# Altium PCB PCB Down.PcbDoc
Units mm, origin at the board's own origin, x right, y up, seen from the top; angles counter-clockwise.
Board outline 90 x 60 mm, 2 copper layers (Top Layer, Bottom Layer), stack 1.569 mm thick; 40 components, 39 nets, 160 pads, 35 vias.
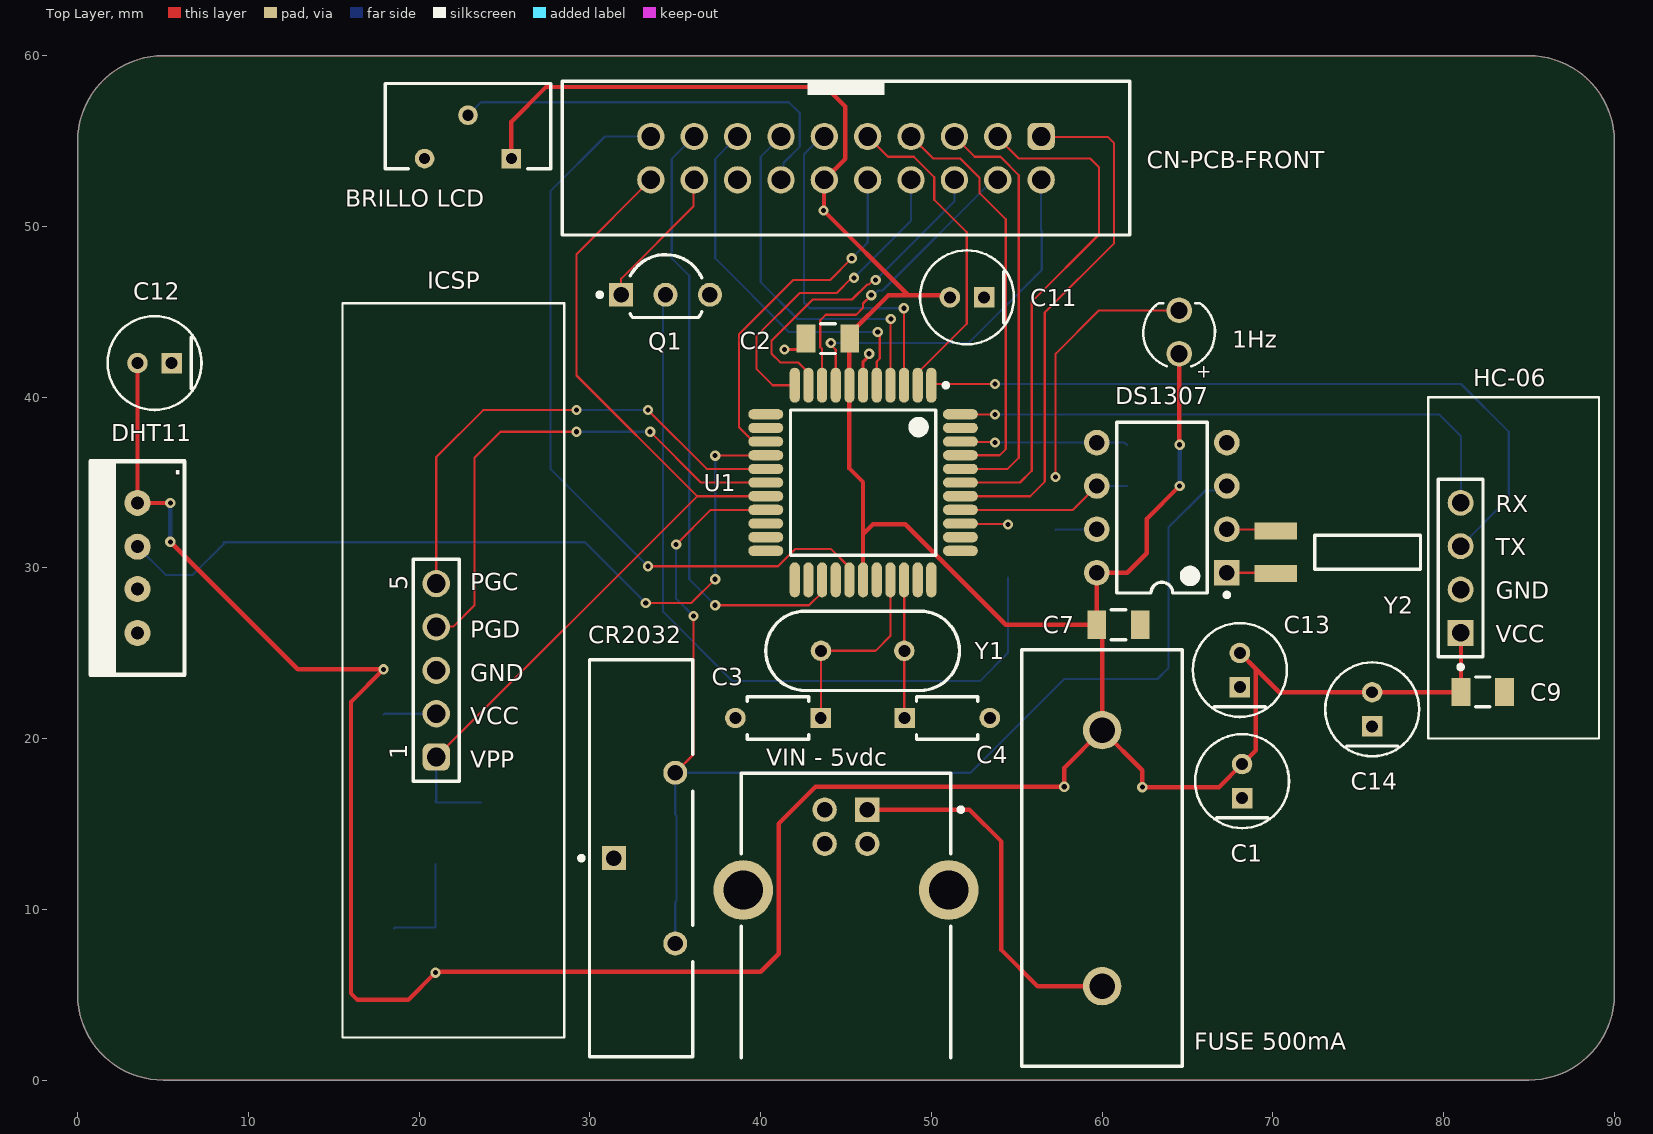
[diagram p0: Top Layer view]
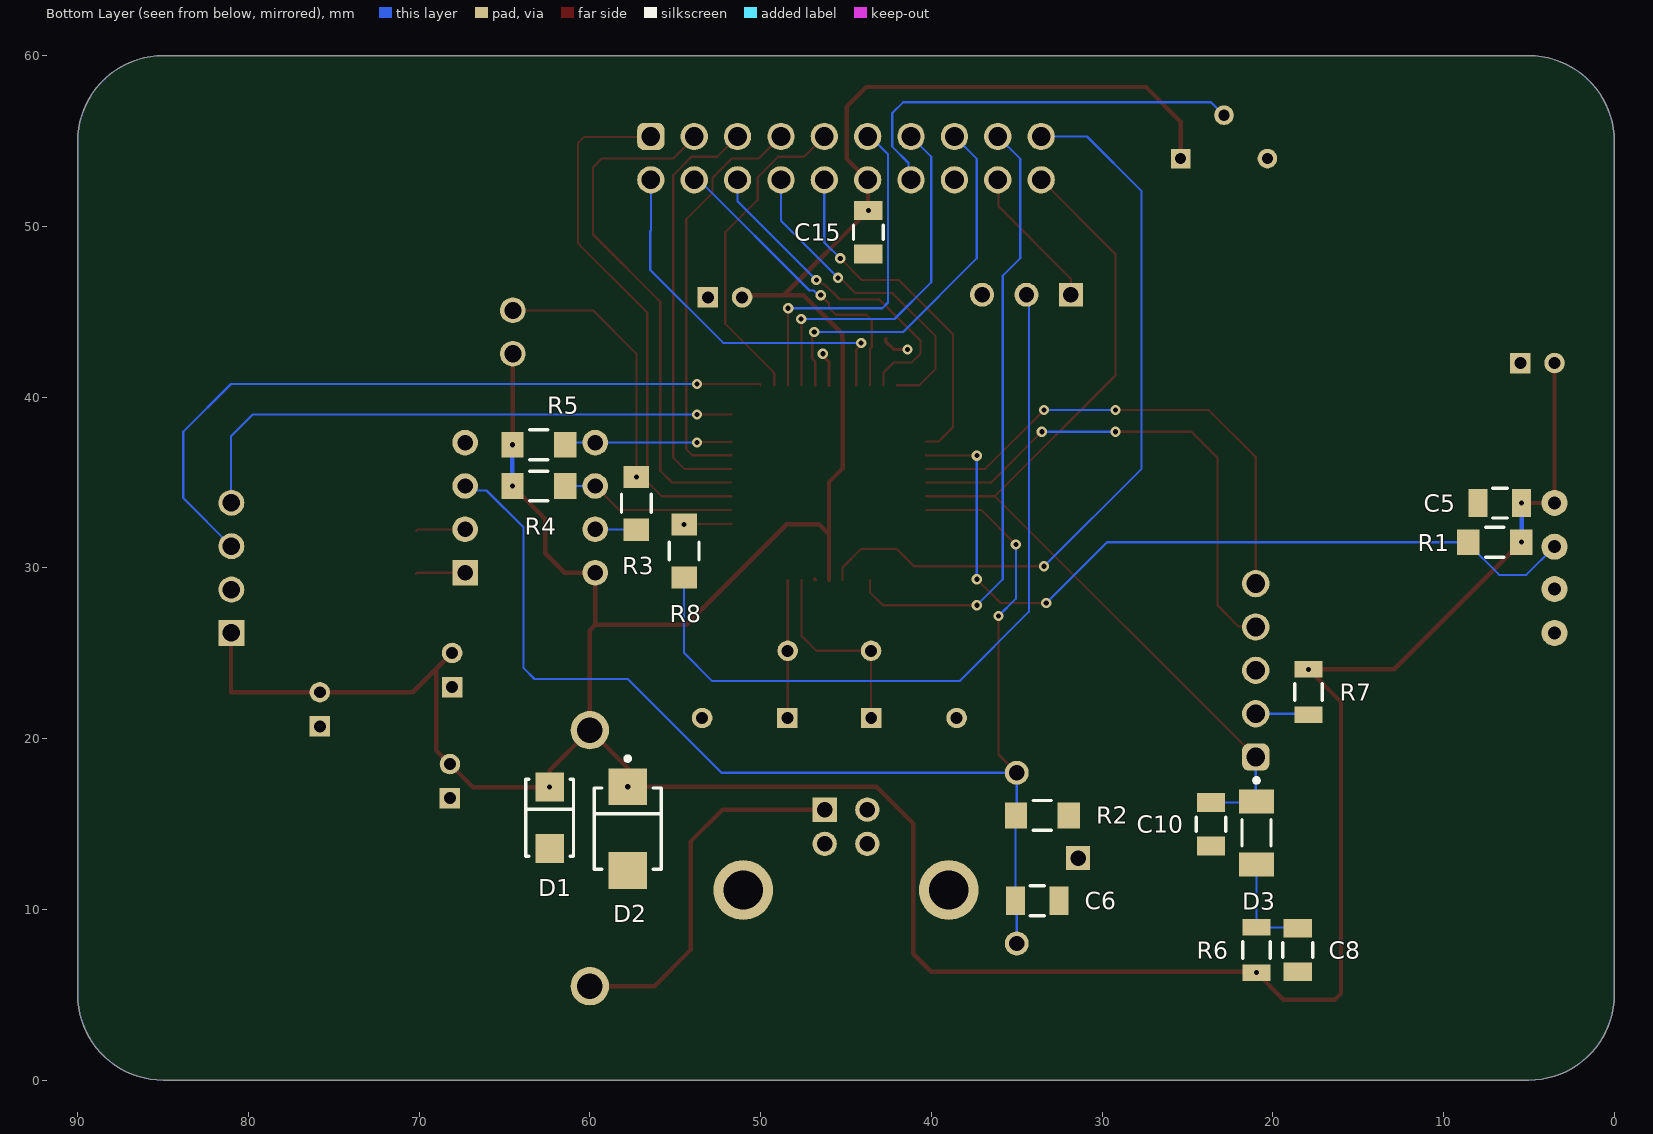
[diagram p1: Bottom Layer view, seen from below]

## Layer stack, top to bottom
Top Solder: solder mask 0.0254, SM-001, Dk 4
Top Layer: signal copper 0.035
Dielectric 1: core 1.4986, Core-043, Dk 4.3
Bottom Layer: signal copper 0.035
Bottom Solder: solder mask 0.0254, SM-001, Dk 4

## Board outline
0,5 0,55 cw(c5,55) 5,60 85,60 cw(c85,55) 90,55 90,5 cw(c85,5) 85,0 5,0 cw(c5,5)

## Design rules (kind name [scope] priority, off if disabled: settings)
AssemblyTestPointUsage [All] p0: scope1count=1 scope1_0_kind=Board scope1_0_value=Board scope2count=1 scope2_0_kind=Board scope2_0_value=Board commentlength=0
AssemblyTestpoint [All] p0: scope1count=1 scope1_0_kind=Board scope1_0_value=Board scope2count=1 scope2_0_kind=Board scope2_0_value=Board commentlength=0
BoardOutlineClearance "JLCPCB BoardOutlineClearance" [All] p0: scope1count=1 scope1_0_kind=Board scope1_0_value=Board scope2count=1 scope2_0_kind=Board scope2_0_value=Board commentlength=0 gap=0.3
BoardOutlineClearance "JLCPCB BoardOutlineClearance" [All] p1: gap=0.3 ignorepadtopadclearanceinfootprint=FALSE
Clearance [All] p0: scope1count=1 scope1_0_kind=Board scope1_0_value=Board scope2count=1 scope2_0_kind=Board scope2_0_value=Board commentlength=0 gap=0.254
Clearance "JLCPCB 1 Clearance" [All] p0: scope1count=1 scope1_0_kind=Board scope1_0_value=Board scope2count=1 scope2_0_kind=Board scope2_0_value=Board commentlength=0 gap=0.254
Clearance "JLCPCB 1 Clearance" [All] p1: gap=0.254 ignorepadtopadclearanceinfootprint=FALSE except(0.127: Arc-Arc Arc-Track Track-Track SMDPad-SMDPad; 0.2: Arc-SMDPad Arc-THPad Track-SMDPad Track-THPad; 0.5: THPad-THPad)
Clearance [All] p2: gap=0.254 ignorepadtopadclearanceinfootprint=FALSE except(0: Arc-Hole Track-Hole SMDPad-Hole THPad-Hole Via-Hole Fill-Hole Poly-Hole Region-Hole Text-Hole)
ComponentClearance [All] p0: scope1count=1 scope1_0_kind=Board scope1_0_value=Board scope2count=1 scope2_0_kind=Board scope2_0_value=Board commentlength=0 gap=0.254 collisioncheckmode=3
DiffPairsRouting "JLCPCB DiffPairsRouting_3" [All] p0 off: scope1count=1 scope1_0_kind=Board scope1_0_value=Board scope2count=1 scope2_0_kind=Board scope2_0_value=Board commentlength=9 // 2 oZ PCB
DiffPairsRouting "JLCPCB DiffPairsRouting_2" [All] p0 off: scope1count=1 scope1_0_kind=Board scope1_0_value=Board scope2count=1 scope2_0_kind=Board scope2_0_value=Board commentlength=15 // 4 and 6 layers
DiffPairsRouting "JLCPCB DiffPairsRouting_1" [All] p0: scope1count=1 scope1_0_kind=Board scope1_0_value=Board scope2count=1 scope2_0_kind=Board scope2_0_value=Board commentlength=15 // 1 and 2 layers
DiffPairsRouting [All] p0: scope1count=1 scope1_0_kind=Board scope1_0_value=Board scope2count=1 scope2_0_kind=Board scope2_0_value=Board commentlength=0
DiffPairsRouting "JLCPCB DiffPairsRouting_1" [All] p1: maxlimit=0.254 minlimit=0.127 mostfreqgap=0.127 toplayer_minwidth=0.127 toplayer_maxwidth=0.381 toplayer_prefwidth=0.127 bottomlayer_minwidth=0.127 bottomlayer_maxwidth=0.381 bottomlayer_prefwidth=0.127 maxuncoupledlength=12.7 // 1 and 2 layers
DiffPairsRouting "JLCPCB DiffPairsRouting_2" [All] p2 off: maxlimit=0.254 minlimit=0.09 mostfreqgap=0.254 toplayer_minwidth=0.09 toplayer_maxwidth=0.381 toplayer_prefwidth=0.381 bottomlayer_minwidth=0.09 bottomlayer_maxwidth=0.381 bottomlayer_prefwidth=0.381 maxuncoupledlength=12.7 // 4 and 6 layers
DiffPairsRouting "JLCPCB DiffPairsRouting_3" [All] p3 off: maxlimit=0.254 minlimit=0.02 mostfreqgap=0.254 toplayer_minwidth=0.02 toplayer_maxwidth=0.381 toplayer_prefwidth=0.381 bottomlayer_minwidth=0.02 bottomlayer_maxwidth=0.381 bottomlayer_prefwidth=0.381 maxuncoupledlength=12.7 // 2 oZ PCB
DiffPairsRouting [All] p4: maxlimit=0.254 minlimit=0.254 mostfreqgap=0.254 toplayer_minwidth=0.381 toplayer_maxwidth=0.381 toplayer_prefwidth=0.381 bottomlayer_minwidth=0.381 bottomlayer_maxwidth=0.381 bottomlayer_prefwidth=0.381 maxuncoupledlength=12.7
FabricationTestPointUsage [All] p0: scope1count=1 scope1_0_kind=Board scope1_0_value=Board scope2count=1 scope2_0_kind=Board scope2_0_value=Board commentlength=0 valid=0 allowmultiple=FALSE
FabricationTestpoint [All] p0: scope1count=1 scope1_0_kind=Board scope1_0_value=Board scope2count=1 scope2_0_kind=Board scope2_0_value=Board commentlength=0 side=3 testpointundercomponent=TRUE minsize=1.016 maxsize=2.54 preferedsize=1.524 minholesize=0 maxholesize=1.016 preferedholesize=0.813 testpointgrid=0.025
FanoutControl Fanout_BGA [All] p0 off: scope1count=1 scope1_0_kind=Board scope1_0_value=Board scope2count=1 scope2_0_kind=Board scope2_0_value=Board commentlength=69 // Protel DXP Scope 1 Expression Was: IsBGA   Fanout_BGA (Default Rule)
FanoutControl Fanout_LCC [All] p0 off: scope1count=1 scope1_0_kind=Board scope1_0_value=Board scope2count=1 scope2_0_kind=Board scope2_0_value=Board commentlength=69 // Protel DXP Scope 1 Expression Was: IsLCC   Fanout_LCC (Default Rule)
FanoutControl Fanout_SOIC [All] p0 off: scope1count=1 scope1_0_kind=Board scope1_0_value=Board scope2count=1 scope2_0_kind=Board scope2_0_value=Board commentlength=71 // Protel DXP Scope 1 Expression Was: IsSOIC   Fanout_SOIC (Default Rule)
FanoutControl Fanout_Small [All] p0 off: scope1count=1 scope1_0_kind=Board scope1_0_value=Board scope2count=1 scope2_0_kind=Board scope2_0_value=Board commentlength=84 // Protel DXP Scope 1 Expression Was: (CompPinCount < 5)   Fanout_Small (Default Rule)
FanoutControl Fanout_Default [All] p0: scope1count=1 scope1_0_kind=Board scope1_0_value=Board scope2count=1 scope2_0_kind=Board scope2_0_value=Board commentlength=30 // Fanout_Default (Default Rule)
Height [All] p0: scope1count=1 scope1_0_kind=Board scope1_0_value=Board scope2count=1 scope2_0_kind=Board scope2_0_value=Board commentlength=0
HoleSize "JLCPCB 2 Hole Size" [All] p0 off: scope1count=1 scope1_0_kind=Board scope1_0_value=Board scope2count=1 scope2_0_kind=Board scope2_0_value=Board commentlength=12 absolutevalues=TRUE maxlimit=6.3 minlimit=0.15 maxpercent=80.000 minpercent=20.000 // MULTILAYERS
HoleSize HoleSize_1 [All] p0: scope1count=1 scope1_0_kind=Board scope1_0_value=Board scope2count=1 scope2_0_kind=Board scope2_0_value=Board commentlength=0 absolutevalues=TRUE maxlimit=2.54 minlimit=0.03 maxpercent=80.000 minpercent=20.000
HoleSize "JLCPCB 1 Hole size" [All] p0: scope1count=1 scope1_0_kind=Board scope1_0_value=Board scope2count=1 scope2_0_kind=Board scope2_0_value=Board commentlength=15 absolutevalues=TRUE maxlimit=6.3 minlimit=0.2 maxpercent=80.000 minpercent=20.000 // 1 and 2 Layers
HoleSize "JLCPCB 1 Hole size" [All] p1: absolutevalues=TRUE maxlimit=6.3 minlimit=0.2 maxpercent=80.000 minpercent=20.000 // 1 and 2 Layers
HoleSize "JLCPCB 2 Hole Size" [All] p2 off: absolutevalues=TRUE maxlimit=6.3 minlimit=0.15 maxpercent=80.000 minpercent=20.000 // MULTILAYERS
HoleSize HoleSize_1 [All] p3: absolutevalues=TRUE maxlimit=2.54 minlimit=0.03 maxpercent=80.000 minpercent=20.000
HoleToHoleClearance [All] p0: scope1count=1 scope1_0_kind=Board scope1_0_value=Board scope2count=1 scope2_0_kind=Board scope2_0_value=Board commentlength=0
HoleToHoleClearance "JLCPCB HoleToHoleClearance" [All] p0: scope1count=1 scope1_0_kind=Board scope1_0_value=Board scope2count=1 scope2_0_kind=Board scope2_0_value=Board commentlength=0
HoleToHoleClearance "JLCPCB HoleToHoleClearance" [All] p1: gap=0.5 allowstackedmicrovias=TRUE
HoleToHoleClearance [All] p2: gap=0.254 allowstackedmicrovias=TRUE
LayerPairs [All] p0: scope1count=1 scope1_0_kind=Board scope1_0_value=Board scope2count=1 scope2_0_kind=Board scope2_0_value=Board commentlength=0 enforce=TRUE
MinimumAnnularRing "JLCPCB Annular ring" [All] p0: scope1count=1 scope1_0_kind=Board scope1_0_value=Board scope2count=1 scope2_0_kind=Board scope2_0_value=Board commentlength=5 minimumring=0.13 // 1 oZ
MinimumAnnularRing "JLCPCB Annular ring" [All] p1: minimumring=0.13 // 1 oZ
MinimumSolderMaskSliver "JLCPCB MinimumSolderMaskSliver_1" [All] p0: scope1count=1 scope1_0_kind=Board scope1_0_value=Board scope2count=1 scope2_0_kind=Board scope2_0_value=Board commentlength=0
MinimumSolderMaskSliver [All] p0: scope1count=1 scope1_0_kind=Board scope1_0_value=Board scope2count=1 scope2_0_kind=Board scope2_0_value=Board commentlength=0
MinimumSolderMaskSliver "JLCPCB MinimumSolderMaskSliver_1" [All] p1: minsoldermaskwidth=0.1
MinimumSolderMaskSliver [All] p2: minsoldermaskwidth=0.254
NetAntennae "JLCPCB NetAntennae_1" [All] p0 off: scope1count=1 scope1_0_kind=Board scope1_0_value=Board scope2count=1 scope2_0_kind=Board scope2_0_value=Board commentlength=0
NetAntennae [All] p0 off: scope1count=1 scope1_0_kind=Board scope1_0_value=Board scope2count=1 scope2_0_kind=Board scope2_0_value=Board commentlength=0
NetAntennae "JLCPCB NetAntennae_1" [All] p1 off: netantennaetolerance=0
NetAntennae [All] p2 off: netantennaetolerance=0
PasteMaskExpansion [All] p0: scope1count=1 scope1_0_kind=Board scope1_0_value=Board scope2count=1 scope2_0_kind=Board scope2_0_value=Board commentlength=0 expansion=0
PlaneClearance [All] p0: scope1count=1 scope1_0_kind=Board scope1_0_value=Board scope2count=1 scope2_0_kind=Board scope2_0_value=Board commentlength=0 clearance=0.508
PlaneConnect [All] p0: scope1count=1 scope1_0_kind=Board scope1_0_value=Board scope2count=1 scope2_0_kind=Board scope2_0_value=Board commentlength=0 planeconnectstyle=Relief reliefexpansion=0.508 reliefentries=4 reliefconductorwidth=0.254 reliefairgap=0.254
PolygonConnect [All] p0: scope1count=1 scope1_0_kind=Board scope1_0_value=Board scope2count=1 scope2_0_kind=Board scope2_0_value=Board commentlength=0 connectstyle=Relief reliefconductorwidth=0.254 reliefentries=4 polygonreliefangle="90 Angle"
PolygonConnect [All] p1: connectstyle=Relief reliefconductorwidth=0.254 reliefentries=4 polygonreliefangle="90 Angle" airgapwidth=0.254
RoutingCorners [All] p0: scope1count=1 scope1_0_kind=Board scope1_0_value=Board scope2count=1 scope2_0_kind=Board scope2_0_value=Board commentlength=0 cornerstyle=45-Degree minsetback=2.54 maxsetback=2.54
RoutingLayers [All] p0: scope1count=1 scope1_0_kind=Board scope1_0_value=Board scope2count=1 scope2_0_kind=Board scope2_0_value=Board commentlength=0 top layer=Automatic bottom layer=Automatic
RoutingPriority [All] p0: scope1count=1 scope1_0_kind=Board scope1_0_value=Board scope2count=1 scope2_0_kind=Board scope2_0_value=Board commentlength=0
RoutingTopology [All] p0: scope1count=1 scope1_0_kind=Board scope1_0_value=Board scope2count=1 scope2_0_kind=Board scope2_0_value=Board commentlength=0 topology=Shortest
RoutingVias RoutingVias_1 [All] p0: scope1count=1 scope1_0_kind=Board scope1_0_value=Board scope2count=1 scope2_0_kind=Board scope2_0_value=Board commentlength=0 holewidth=0.711 width=1.27 viastyle="Through Hole" minholewidth=0.711 minwidth=1.27 maxholewidth=0.711 maxwidth=1.27
RoutingVias "JLCPCB 1RoutingVias" [All] p0: scope1count=1 scope1_0_kind=Board scope1_0_value=Board scope2count=1 scope2_0_kind=Board scope2_0_value=Board commentlength=15 holewidth=0.711 width=1.27 viastyle="Through Hole" minholewidth=0.3 minwidth=0.5 maxholewidth=0.711 maxwidth=1.27 // 1 and 2 layers
RoutingVias "JLCPCB 2 RoutingVias" [All] p0: scope1count=1 scope1_0_kind=Board scope1_0_value=Board scope2count=1 scope2_0_kind=Board scope2_0_value=Board commentlength=12 holewidth=0.711 width=1.27 viastyle="Through Hole" minholewidth=0.15 minwidth=0.25 maxholewidth=0.711 maxwidth=1.27 // Multilayers
RoutingVias "JLCPCB 1RoutingVias" [All] p1: holewidth=0.711 width=1.27 viastyle="Through Hole" minholewidth=0.3 minwidth=0.5 maxholewidth=0.711 maxwidth=1.27 // 1 and 2 layers
RoutingVias "JLCPCB 2 RoutingVias" [All] p2: holewidth=0.711 width=1.27 viastyle="Through Hole" minholewidth=0.15 minwidth=0.25 maxholewidth=0.711 maxwidth=1.27 // Multilayers
RoutingVias RoutingVias_1 [All] p3: holewidth=0.711 width=1.27 viastyle="Through Hole" minholewidth=0.711 minwidth=1.27 maxholewidth=0.711 maxwidth=1.27
ShortCircuit [All] p0: scope1count=1 scope1_0_kind=Board scope1_0_value=Board scope2count=1 scope2_0_kind=Board scope2_0_value=Board commentlength=0 allowed=FALSE
SilkToBoardRegionClearance [All] p0: scope1count=1 scope1_0_kind=Board scope1_0_value=Board scope2count=1 scope2_0_kind=Board scope2_0_value=Board commentlength=0
SilkToSilkClearance "JLCPCB SilkToSilkClearance_1" [All] p0: scope1count=1 scope1_0_kind=Board scope1_0_value=Board scope2count=1 scope2_0_kind=Board scope2_0_value=Board commentlength=0
SilkToSilkClearance [All] p0: scope1count=1 scope1_0_kind=Board scope1_0_value=Board scope2count=1 scope2_0_kind=Board scope2_0_value=Board commentlength=0
SilkToSilkClearance "JLCPCB SilkToSilkClearance_1" [All] p1: silktosilkclearance=0.15
SilkToSilkClearance [All] p2: silktosilkclearance=0.254
SilkToSolderMaskClearance "JLCPCB SilkToSolderMaskClearance_1 Ilegal" [All] p0 off: scope1count=1 scope1_0_kind=Board scope1_0_value=Board scope2count=1 scope2_0_kind=Board scope2_0_value=Board commentlength=44 // Protel DXP Scope 1 Expression Was: IsPad
SilkToSolderMaskClearance "JLCPCB SilkToSolderMaskClearance_1" [All] p0 off: scope1count=1 scope1_0_kind=Board scope1_0_value=Board scope2count=1 scope2_0_kind=Board scope2_0_value=Board commentlength=44 // Protel DXP Scope 1 Expression Was: IsPad
SilkToSolderMaskClearance [All] p0 off: scope1count=1 scope1_0_kind=Board scope1_0_value=Board scope2count=1 scope2_0_kind=Board scope2_0_value=Board commentlength=44 // Protel DXP Scope 1 Expression Was: IsPad
SilkToSolderMaskClearance "JLCPCB SilkToSolderMaskClearance_1 Ilegal" [IsPad] p1: minsilkscreentomaskgap=0.1 clearancetoexposedcopper=TRUE
SilkToSolderMaskClearance "JLCPCB SilkToSolderMaskClearance_1" [IsPad] p2: minsilkscreentomaskgap=0.15 clearancetoexposedcopper=TRUE
SilkToSolderMaskClearance [IsPad] p3: minsilkscreentomaskgap=0.254 clearancetoexposedcopper=TRUE
SolderMaskExpansion "JLCPCB SolderMaskExpansion_1" [All] p0: scope1count=1 scope1_0_kind=Board scope1_0_value=Board scope2count=1 scope2_0_kind=Board scope2_0_value=Board commentlength=0 expansion=0.038
SolderMaskExpansion [All] p0: scope1count=1 scope1_0_kind=Board scope1_0_value=Board scope2count=1 scope2_0_kind=Board scope2_0_value=Board commentlength=0 expansion=0.102
SolderMaskExpansion "JLCPCB SolderMaskExpansion_1" [All] p1: expansion=0.038 istentingtop=FALSE useseparateexpansions=TRUE expansionbottom=0.05 istentingbottom=FALSE
SolderMaskExpansion [All] p2: expansion=0.102 istentingtop=FALSE
UnRoutedNet [All] p0: scope1count=1 scope1_0_kind=Board scope1_0_value=Board scope2count=1 scope2_0_kind=Board scope2_0_value=Board commentlength=0
UnpouredPolygon [All] p0: scope1count=1 scope1_0_kind=Board scope1_0_value=Board scope2count=1 scope2_0_kind=Board scope2_0_value=Board commentlength=0
Width "JLCPCB Width 3" [All] p0 off: scope1count=1 scope1_0_kind=Board scope1_0_value=Board scope2count=1 scope2_0_kind=Board scope2_0_value=Board commentlength=9 maxlimit=0.254 minlimit=0.02 preferedwidth=0.254 // 2 oZ PCB
Width "JLCPCB Width 2" [All] p0 off: scope1count=1 scope1_0_kind=Board scope1_0_value=Board scope2count=1 scope2_0_kind=Board scope2_0_value=Board commentlength=15 maxlimit=0.254 minlimit=0.09 preferedwidth=0.254 // 4 and 6 Layers
Width [All] p0: scope1count=1 scope1_0_kind=Board scope1_0_value=Board scope2count=1 scope2_0_kind=Board scope2_0_value=Board commentlength=0 maxlimit=0.254 minlimit=0.254 preferedwidth=0.254
Width "JLCPCB Width 1" [All] p0: scope1count=1 scope1_0_kind=Board scope1_0_value=Board scope2count=1 scope2_0_kind=Board scope2_0_value=Board commentlength=15 maxlimit=6 minlimit=0.127 preferedwidth=0.127 // 1 and 2 layers
Width "JLCPCB Width 1" [All] p1: maxlimit=6 minlimit=0.127 preferedwidth=0.127 // 1 and 2 layers
Width "JLCPCB Width 2" [All] p2 off: maxlimit=0.254 minlimit=0.09 preferedwidth=0.254 // 4 and 6 Layers
Width "JLCPCB Width 3" [All] p3 off: maxlimit=0.254 minlimit=0.02 preferedwidth=0.254 // 2 oZ PCB
Width [All] p4: maxlimit=0.254 minlimit=0.254 preferedwidth=0.254
23 further rules are at their usual default settings.

## Classes and differential pairs
net class S[0..4]: S0 S1 S2 S3 S4
net class D[0..7]: D0 D1 D2 D3 D4 D5 D6 D7
component class HC-06: C9 C14 HC-06
component class "Sensor de temperatura": C5 C12 DHT11 R1
component class "Salida PCB Front": "BRILLO LCD" C15 CN-PCB-FRONT Q1 R8
component class "Programacion ICSP": C8 C10 D3 ICSP R6 R7
component class Microcontrolador: C2 C3 C4 C11 U1 Y1
component class "Fuente Alimentacion": C1 D1 D2 "FUSE 500mA" "VIN - 5vdc"
component class DS1307: 1Hz C6 C7 C13 CR2032 DS1307 R2 R3 R4 R5 Y2

## Components (designator, comment, footprint, x,y, rotation, side; value= is the part's Value field where it differs from the comment)
1Hz "151031YS05900" WL-TMRC_D3.95H5.3 -1205.484,1313.815 r90 top
"BRILLO LCD" "T93YB103KT20" FP-T93YB-MFG 22.86,55.875 r270 top
C1 "EEUHD1C101" FP-RAD-TH-D_5_0_5-L_11_1-MFG 68.199,17.51 r90 top
C2 "CL31B104KBCNFNC" FP-CL31-IPC_C 43.942,43.434 r0 top
C3 "RCE5C2A150J0K1H03B" FP-RCE0K1-MFG 41.021,21.209 r180 top
C4 "RCE5C2A150J0K1H03B" FP-RCE0K1-MFG 50.927,21.209 r0 top
C5 "CL31B104KBCNFNC" FP-CL31-IPC_C 6.7,33.8 r180 bottom
C6 "CL31B104KBCNFNC" FP-CL31-IPC_C 33.8,10.5 r0 bottom
C7 "CL31B104KBCNFNC" FP-CL31-IPC_C 60.96,26.67 r180 top
C8 "CL31B104KBCNFNC" FP-CL31-IPC_C 18.542,7.62 r90 bottom
C9 "CL31B104KBCNFNC" FP-CL31-IPC_C 82.296,22.733 r180 top
C10 "CL31B104KBCNFNC" FP-CL31-IPC_C 23.622,14.986 r90 bottom
C11 "EEUHD1C101" FP-RAD-TH-D_5_0_5-L_11_1-MFG 52.086,45.847 r180 top
C12 "EEUHD1C101" FP-RAD-TH-D_5_0_5-L_11_1-MFG 4.5,42 r180 top
C13 "EEUHD1C101" FP-RAD-TH-D_5_0_5-L_11_1-MFG 68.072,24.019 r90 top
C14 "EEUHD1C101" FP-RAD-TH-D_5_0_5-L_11_1-MFG 75.819,21.717 r90 top
C15 "CL31B104KBCNFNC" FP-CL31-IPC_C 43.688,49.657 r270 bottom
CN-PCB-FRONT "61202021621" 61202021621 45,54 r180 top
CR2032 "1775485-1" FP-1775485-1-MFG 33,13 r90 top
D1 "ES1D-M3/61T" FP-SMA-MFG 62.357,15.367 r270 bottom
D2 "SMBJ5.0A" FP-SMBJ-MFG 57.785,14.732 r270 bottom
D3 "JAN1N4148UR-1" FP-DO-213AA-MFG 20.955,14.478 r270 bottom
DHT11 "DHT11" DHT11 3.5,30 r0 top
DS1307 "DS1307+" P8+2 63.5,33.528 r180 top
"FUSE 500mA" "696106003002" 696106003002 60,13 r270 top
HC-06 "MTLW-104-05-G-S-185" FP-MTLW-104-05-G-S-185-MFG 81,30 r90 top
ICSP "61300511121" 61300511121 21,24 r90 top
Q1 "BC337-40RL1G" ONSC-TO-92-3-29-11_AM_BL 34.429,46 r0 top
R1 "RC3216F472CS" FP-RC3216-MFG 7,31.5 r180 bottom
R2 "RC3216F472CS" FP-RC3216-MFG 33.5,15.5 r180 bottom
R3 "RC3216F472CS" FP-RC3216-MFG 57.277,33.782 r270 bottom
R4 "RC3216F472CS" FP-RC3216-MFG 62.992,34.798 r180 bottom
R5 "RC3216F472CS" FP-RC3216-MFG 62.992,37.211 r180 bottom
R6 "CRCW120610K0FKEA" FP-CRCW1206-e3-IPC_C 20.955,7.62 r90 bottom
R7 "CRCW120610K0FKEA" FP-CRCW1206-e3-IPC_C 17.907,22.733 r270 bottom
R8 "RC3216F472CS" FP-RC3216-MFG 54.483,30.988 r270 bottom
U1 "PIC16F877A-I/PT" TQFP-PT44_M 46,35 r270 top
"VIN - 5vdc" "67068-8011" FP-67068-8011-MFG 45,9.35 r0 top
Y1 "FOXSLF/120-20" FOX-FOXSLF-2_V 45.974,25.146 r180 top
Y2 "AB26TRB-32.768KHZ-T" FP-AB26TRB-MFG 75.552,30.911 r180 top

## Footprints (in the part's own frame and the unit in brackets; to place one, negate y for a bottom-side part, rotate by r counter-clockwise, add the part's x,y. Pads: shape width x height; smd on the part's side, far side on the other; paste and mask are expansions set on the pad)
61202021621 [mm] "20 pins, straight, gold plating"
  rrect50% 1.6x1.6 hole 1.1: 1(-11.43,-1.27)
  round 1.6 hole 1.1: 2(-11.43,1.27) 3(-8.89,-1.27) 4(-8.89,1.27) 5(-6.35,-1.27) 6(-6.35,1.27) 7(-3.81,-1.27) 8(-3.81,1.27) 9(-1.27,-1.27) 10(-1.27,1.27) 11(1.27,-1.27) 12(1.27,1.27) 13(3.81,-1.27) 14(3.81,1.27) 15(6.35,-1.27) 16(6.35,1.27) 17(8.89,-1.27) 18(8.89,1.27) 19(11.43,-1.27) 20(11.43,1.27)
  silkscreen extent -16.63,-4.5 16.63,4.5
61300511121 [mm] "Pin Header, pitch 2.54 mm, THT, Vertical, single row, 5p"
  rrect50% 1.6x1.6 hole 1.1: 1(-5.08,0)
  round 1.6 hole 1.1: 2(-2.54,0) 3(0,0) 4(2.54,0) 5(5.08,0)
  silkscreen extent -6.5,-1.35 6.5,1.35
696106003002 [mm] "FUSEHOLDER BLOCKS - PCB - CLIP COVER - THT"
  round 2.25 hole 1.5: 1(-7.5,0) 2(7.5,0)
  silkscreen extent -12.2,-4.7 12.2,4.7
DHT11 [mil]
  round 60 hole 30: 1(0,150) 2(0,48.82) 3(0,-48.82) 4(0,-150)
  silkscreen extent -110,-246 108,246
FOX-FOXSLF-2_V [mm] "THD, 2-Leads, Body 11.35x4.65mm, Pitch 4.88mm"
  round 1.2 hole 0.7: 1(-2.44,0) 2(2.44,0)
  silkscreen extent -5.68,-2.32 5.68,2.32
FP-67068-8011-MFG [mm]
  rect 1.42x1.42 hole 0.92 paste-1000 mask+0: 1(1.25,6.49)
  round 1.42 hole 0.92 paste-1000 mask+0: 2(-1.25,6.49) 3(-1.25,4.49) 4(1.25,4.49)
  round 3.5 hole 2.3 paste-1000 mask+0: 5(-6.02,1.78) 6(6.02,1.78)
  silkscreen extent -6.12,-8.05 6.85,8.62
FP-1775485-1-MFG [mm]
  rect 1.4x1.4 hole 0.9 paste-1000 mask+0: 1(0,1.6)
  round 1.4 hole 0.9 paste-1000 mask+0: 2(-5,-2) 2(5,-2)
  silkscreen extent -11.63,-3.03 11.63,3.62
FP-AB26TRB-MFG [mm]
  rect 2.5x1 smd paste+0 mask+0: 1(5.375,1.25) 2(5.375,-1.25)
  silkscreen extent -3.1,-1 3.1,1
FP-CL31-IPC_C [mm]
  rect 1.105x1.658 smd paste+0 mask+0: 1(-1.276,0) 2(1.276,0)
  silkscreen extent -0.42,-0.87 0.42,0.87
FP-CRCW1206-e3-IPC_C [mm]
  rect 0.956x1.658 smd paste+0 mask+0: 1(-1.326,0) 2(1.326,0)
  silkscreen extent -0.47,-0.8 0.47,0.8
FP-DO-213AA-MFG [mm]
  rect 1.4x2.03 smd paste+0 mask+0: 1(-1.84,0) 2(1.84,0)
  silkscreen extent -3.2,-0.85 0.76,0.85
FP-MTLW-104-05-G-S-185-MFG [mm]
  rect 1.52x1.52 hole 1.02 paste-1000 mask+0: 1(-3.81,0)
  round 1.52 hole 1.02 paste-1000 mask+0: 2(-1.27,0) 3(1.27,0) 4(3.81,0)
  silkscreen extent -5.93,-1.31 5.21,1.31
FP-RAD-TH-D_5_0_5-L_11_1-MFG [mm]
  rect 1.2x1.2 hole 0.7 paste-1000 mask+0: 1(-1,0)
  round 1.2 hole 0.7 paste-1000 mask+0: 2(1,0)
  silkscreen extent -2.75,-2.75 2.75,2.75
FP-RC3216-MFG [mm]
  rect 1.3x1.5 smd paste+0 mask+0: 1(-1.55,0) 2(1.55,0)
  silkscreen extent -0.53,-0.87 0.53,0.87
FP-RCE0K1-MFG [mm]
  rect 1.2x1.2 hole 0.7 paste-1000 mask+0: 1(-2.5,0)
  round 1.2 hole 0.7 paste-1000 mask+0: 2(2.5,0)
  silkscreen extent -1.8,-1.25 1.8,1.25
FP-SMA-MFG [mm]
  rect 1.7x1.68 smd paste+0 mask+0: 1(-1.79,0) 2(1.79,0)
  silkscreen extent -2.25,-1.4 2.25,1.4
FP-SMBJ-MFG [mm]
  rect 2.16x2.26 smd paste+0 mask+0: 1(-2.45,0) 2(2.45,0)
  silkscreen extent -4.22,-1.97 2.37,1.97
FP-T93YB-MFG [mm]
  rect 1.15x1.15 hole 0.65 paste-1000 mask+0: 1(1.9,2.54)
  round 1.15 hole 0.65 paste-1000 mask+0: 2(-0.64,0) 3(1.9,-2.54)
  silkscreen extent -2.5,-4.85 2.5,4.85
ONSC-TO-92-3-29-11_AM_BL [mm] "TO, 3-Leads, Body Dia 4.7mm, Pitch 2.6mm"
  rect 1.4x1.4 hole 0.9: 1(-2.6,0)
  round 1.4 hole 0.9: 2(0,0) 3(2.6,0)
  silkscreen extent -3.97,-1.34 2.13,2.35
P8+2 [mm] "DIP, 8-Leads, Row Spacing 7.62mm, Pitch 2.54mm, Body 9.4x7mm"
  rect 1.5x1.5 hole 0.9: 1(-3.81,3.81)
  round 1.5 hole 0.9: 2(-3.81,1.27) 3(-3.81,-1.27) 4(-3.81,-3.81) 5(3.81,-3.81) 6(3.81,-1.27) 7(3.81,1.27) 8(3.81,3.81)
  silkscreen extent -3.94,-5 2.65,5.23
TQFP-PT44_M [mm] "Thin QFP, 44-Leads, Body 10x10mm, Pitch 0.8mm, IPC Low Density"
  oval 2.05x0.6 smd: 1(-5.7,4) 2(-5.7,3.2) 3(-5.7,2.4) 4(-5.7,1.6) 5(-5.7,0.8) 6(-5.7,0) 7(-5.7,-0.8) 8(-5.7,-1.6) 9(-5.7,-2.4) 10(-5.7,-3.2) 11(-5.7,-4) 23(5.7,-4) 24(5.7,-3.2) 25(5.7,-2.4) 26(5.7,-1.6) 27(5.7,-0.8) 28(5.7,0) 29(5.7,0.8) 30(5.7,1.6) 31(5.7,2.4) 32(5.7,3.2) 33(5.7,4)
  oval 0.6x2.05 smd: 12(-4,-5.7) 13(-3.2,-5.7) 14(-2.4,-5.7) 15(-1.6,-5.7) 16(-0.8,-5.7) 17(0,-5.7) 18(0.8,-5.7) 19(1.6,-5.7) 20(2.4,-5.7) 21(3.2,-5.7) 22(4,-5.7) 34(4,5.7) 35(3.2,5.7) 36(2.4,5.7) 37(1.6,5.7) 38(0.8,5.7) 39(0,5.7) 40(-0.8,5.7) 41(-1.6,5.7) 42(-2.4,5.7) 43(-3.2,5.7) 44(-4,5.7)
  silkscreen extent -5.82,-4.25 4.25,4.98
WL-TMRC_D3.95H5.3 [mm] "THT Mono-color Round Color LED, 2-leads"
  round 1.5 hole 1: 1(-1271.27,-1270) 2(-1268.73,-1270)
  silkscreen extent -1272,-1272.1 -1268.31,-1267.9

## Part data
1Hz: library part CMP-1488-00003-2
"BRILLO LCD": library part CMP-00030-39738570-1, "T93YB103KT20 Resistor Trimmer, Cermet, 10 kOhm, ± 10%, 500 mW, 23 Turn, Multi Turn, Through Hole"
C1 C11 C12 C13 C14: library part CMP-05427-000949-1, "Aluminum Electrolytic Capacitors (Radial Lead Type) AEC-Q200 Qualified 100uF ±20% 16V"
C2 C5 C6 C7 C8 C9 C10 C15: library part CMP-13271-001276-1, "Cap Ceramic 100nF 50V X7R ±10% SMD 1206 +125°C Embossed T/R"
C3 C4: library part CMP-06035-032591-1, "Cap Ceramic 15pF 100V C0G ±5% Radial 5mm +125°C Automotive Bulk"
CN-PCB-FRONT: library part CMP-1502-00010-2
CR2032: library part CMP-03355-000025-1, "BATT HLDR COIN 20MM 1 CEL PC PIN"
D1: library part CMP-02540-000096-1, "DIODE GEN PURP 200V 1A DO214AC"
D2: library part CMP-08607-000042-1, "TVS DIODE 5V 9.2V DO214AA"
D3: library part CMP-06359-000008-1, "DIODE GEN PURP 100V 200MA DO213"
DHT11: "SENSOR DE TEMPERATURA"
DS1307: library part CMP-0254-00152-1, "64 x 8, Serial, I2C Real-Time Clock, 5.0V, 8-Pin PDIP, 0 to 70 degC, Pb-Free"
"FUSE 500mA": library part CMP-1502-00235-2
HC-06: library part CMP-02766-000562-1, "CONN HEADER VERT 4POS 2.54MM"
ICSP: library part CMP-1502-01068-2
Q1: library part CMP-1048-01582-1, "Amplifier Transistor, NPN Silicon, 3-Pin TO-92, Pb-Free, Tape and Reel"
R1 R2 R3 R4 R5 R8: library part CMP-13261-005727-1, "Res Thick Film 1206 4.7kO 1% 0.25W ±100ppm/°C Molded SMD T/R"
R6 R7: library part CMP-2003-04807-2, "RES Thick Film, 10kO, 1%, 0.25W, 100ppm/°C, 1206"
U1: library part CMP-0115-00678-1, "Enhanced FLASH Microcontroller, 8K (x14-Bit words) FLASH, 368 Bytes RAM, 44-Pin TQFP, Standard VDD Range, Industrial Temperature"
"VIN - 5vdc": library part CMP-00257-00942133-1, "67068-8011 Conn USB 2.0 Type B RCP 4 POS 2.5mm Solder RA Thru-Hole 4 Terminal 1 Port USB 2.0 Tray"
Y1: library part CMP-1749-00004-1, "Resistance Weld Thru-Hole Crystal, 12 MHz, +/-30 ppm, -20 to 70 degC, 2-Pin THD, RoHS, Bulk"
Y2: library part CMP-27762-006068-1, "CRYSTAL 32.7680KHZ 12.5PF TH"

## Via types
v1: diameter 0.6, hole 0.3, Top Layer to Bottom Layer, 35 vias

## Nets (pads, with @x,y where several pads share a name; then routed paths per layer and width w, separated by ;. In a path a pad name is that pad's centre, name@x,y a point inside that pad or via, vN(x,y) a via of type N, cw(c..) or ccw(c..) an arc to the next point about the centre after c; other vN are vias at no path point)
5vdc: 1Hz.1 "BRILLO LCD.1" "FUSE 500mA.1" C1.2 C2.2 C5.2 C7.2 C9.2 C11.2 C12.2 C13.2 C14.2 C15.1 CN-PCB-FRONT.12 D1.1 D2.1 DHT11.1 DS1307.8 HC-06.1 R1.2 R4.1 R5.1 R6.1 R7.1 U1.7 U1.28 | length 237.5
  Top Layer w0.254: C12.2 DHT11.1 3.505,33.805 5.419,33.805 v1(5.424,33.8) ; v1(5.424,31.526) 12.891,24.059 v1(17.907,24.059) 16.002,22.154 16.002,5.08 16.383,4.699 19.36,4.699 v1(20.955,6.294) 21.011,6.35 40.005,6.35 41.057,7.402 41.057,15.022 43.217,17.182 v1(57.785,17.182) 57.785,18.285 60,20.5 ; 25.4,53.975 25.4,56.134 27.432,58.166 43.815,58.166 44.958,57.023 44.958,53.958 CN-PCB-FRONT.12 43.709,52.709 43.709,50.954 v1(43.688,50.933) 48.647,45.974 ; U1.28 46,31.977 ; C11.2 50.959,45.974 48.647,45.974 ; 1Hz.1 64.529,42.532 64.529,37.224 v1(64.542,37.211) ; v1(64.542,34.798) 62.624,32.88 62.624,32.779 62.611,32.766 62.611,30.861 61.468,29.718 DS1307.8 59.69,26.676 C7.2 ; C13.2 68.999,24.092 ; HC-06.1 81.02,26.17 C9.2 81.004,22.717 C14.2 70.374,22.717 68.999,24.092 ; 46,31.977 46,35.026 45.2,35.826 U1.7 45.2,43.416 C2.2 45.218,43.71 47.482,45.974 48.647,45.974 ; 46,31.977 46.581,32.558 48.468,32.558 54.356,26.67 C7.2 ; C7.2 60,26.354 60,20.5 ; 60,20.5 62.357,18.143 v1(62.357,17.157) 66.846,17.157 C1.2 68.999,19.31 68.999,24.092
  Bottom Layer w0.254: v1(5.424,33.8) v1(5.424,31.526) R1.2 ; v1(64.542,34.798) v1(64.542,37.211)
BUZZER: CN-PCB-FRONT.18 Q1.1 | length 8.5
  Top Layer w0.127: Q1.1 31.829,46.942 36.068,51.181 36.068,52.688 CN-PCB-FRONT.18
D0: CN-PCB-FRONT.1 U1.38 | length 31.2
  Top Layer w0.127: U1.38 55.79,34.2 56.642,35.052 56.642,44.958 60.706,49.022 60.706,54.864 60.325,55.245 56.455,55.245 CN-PCB-FRONT.1
D1: CN-PCB-FRONT.3 U1.39 | length 30.6
  Top Layer w0.127: U1.39 55.193,35 55.88,35.687 55.88,45.593 59.817,49.53 59.817,53.467 59.309,53.975 55.118,53.975 53.89,55.203 CN-PCB-FRONT.3
D2: CN-PCB-FRONT.5 U1.40 | length 24.9
  Top Layer w0.127: CN-PCB-FRONT.5 52.541,54.079 54.045,54.079 55.118,53.006 55.118,36.449 54.469,35.8 U1.40
D3: CN-PCB-FRONT.7 U1.41 | length 24.3
  Top Layer w0.127: CN-PCB-FRONT.7 50.105,53.975 51.689,53.975 52.826,52.838 52.826,51.949 54.356,50.419 54.356,36.957 53.999,36.6 U1.41
D4: CN-PCB-FRONT.9 U1.2 | length 19
  Top Layer w0.127: CN-PCB-FRONT.9 47.461,54.079 48.965,54.079 50.165,52.879 50.165,51.562 52.07,49.657 52.07,44.295 49.2,41.425 U1.2
D5: CN-PCB-FRONT.11 U1.3 | length 20.8
  Top Layer w0.127: v1(48.387,45.212) 48.393,45.206 48.393,40.706 U1.3
  Bottom Layer w0.127: CN-PCB-FRONT.11 43.586,55.27 42.545,54.229 42.545,45.54 42.873,45.212 v1(48.387,45.212)
D6: CN-PCB-FRONT.13 U1.4 | length 21.4
  Top Layer w0.127: U1.4 47.613,40.712 47.613,44.565 v1(47.625,44.577)
  Bottom Layer w0.127: CN-PCB-FRONT.13 40.005,54.085 40.005,46.736 42.164,44.577 v1(47.625,44.577)
D7: CN-PCB-FRONT.15 U1.5 | length 22.2
  Top Layer w0.127: U1.5 46.8,42.091 46.972,42.263 46.972,43.578 46.863,43.687 v1(46.863,43.815)
  Bottom Layer w0.127: CN-PCB-FRONT.15 37.338,53.958 37.338,48.133 41.656,43.815 v1(46.863,43.815)
E: CN-PCB-FRONT.19 U1.27 | length 44.9
  Top Layer w0.127: v1(33.401,30.099) 41.021,30.099 42.037,31.115 44.11,31.115 45.2,30.025 U1.27
  Bottom Layer w0.127: v1(33.401,30.099) 27.686,35.814 27.686,52.07 30.886,55.27 CN-PCB-FRONT.19
GND: "BRILLO LCD.3" "VIN - 5vdc.4" "VIN - 5vdc.5" "VIN - 5vdc.6" C1.1 C2.1 C3.2 C4.2 C5.1 C6.1 C7.1 C8.1 C9.1 C10.1 C11.1 C12.1 C13.1 C14.1 C15.2 CN-PCB-FRONT.16 CR2032.1 D1.2 D2.2 DHT11.4 DS1307.4 HC-06.2 ICSP.3 Q1.3 R2.2 U1.6 U1.29 | length 3.7
  Top Layer w0.191: v1(41.402,42.799) 42.208,42.799 42.666,43.256 C2.1 ; U1.6@45.987,40.687 U1.6 46,42.079 46.355,42.434 v1(46.355,42.545) ; U1.29 U1.29@46.831,29.331
Net1Hz_2: 1Hz.2 R3.1 | length 15.5
  Top Layer w0.127: v1(57.277,35.332) 57.277,42.545 59.817,45.085 1Hz.2
NetC3_1: C3.1 U1.30 Y1.2 | length 11.7
  Top Layer w0.127: C3.1 43.534,21.222 Y1.2 46.736,25.146 47.6,26.01 U1.30
NetC4_1: C4.1 U1.31 Y1.1 | length 8.1
  Top Layer w0.127: U1.31 48.407,29.293 48.407,25.153 Y1.1 48.414,21.222 C4.1
NetC6_2: C6.2 CR2032.2 DS1307.3 R2.1 U1.19 | length 74.5
  Top Layer w0.127: CR2032.2@35,18 36.068,19.068 v1(36.068,27.178) ; v1(35.052,31.369) 37.083,33.4 U1.19
  Bottom Layer w0.127: CR2032.2@35,8 35,10.424 C6.2 35.076,15.474 R2.1 35,15.55 35,18 52.29,18 57.785,23.495 63.246,23.495 63.881,24.13 63.881,32.364 66.052,34.535 67.047,34.535 DS1307.3 ; v1(35.052,31.369) 35.052,28.194 v1(36.068,27.178)
NetC8_2: C8.2 D3.2 R6.2 | length 6.1
  Bottom Layer w0.127: C8.2 18.592,8.946 R6.2 D3.2
NetCN-PCB-FRONT_17: CN-PCB-FRONT.17 U1.25 | length 36.4
  Top Layer w0.127: v1(37.338,27.813) 42.838,27.813 43.6,28.575 U1.25
  Bottom Layer w0.127: CN-PCB-FRONT.17 34.798,53.958 34.798,48.133 35.814,47.117 35.814,29.337 v1(37.338,27.813)
NetDHT11_2: DHT11.2 R1.1 U1.15 | length 47.6
  Top Layer w0.127: v1(33.274,27.94) 35.941,27.94 v1(37.338,29.337) ; v1(37.338,36.576) 37.35,36.588 40.288,36.588 U1.15
  Bottom Layer w0.127: DHT11.2 5.149,29.591 6.741,29.591 8.55,31.4 R1.1 29.714,31.5 v1(33.274,27.94) ; v1(37.338,29.337) v1(37.338,36.576)
NetDS1307_1: DS1307.1 Y2.1 | length 2.9
  Top Layer w0.127: DS1307.1 70.12,29.718 Y2.1
NetDS1307_2: DS1307.2 Y2.2 | length 2.9
  Top Layer w0.127: DS1307.2 70.08,32.258 Y2.2
NetDS1307_5: DS1307.5 R5.2 U1.42 | length 9.8
  Top Layer w0.127: U1.42 51.731,37.369 53.69,37.369 v1(53.721,37.338)
  Bottom Layer w0.127: v1(53.721,37.338) DS1307.5 61.315,37.338 R5.2
NetDS1307_6: DS1307.6 R4.2 U1.37 | length 10.3
  Top Layer w0.127: U1.37 58.292,33.4 DS1307.6
  Bottom Layer w0.127: DS1307.6 R4.2
NetDS1307_7: DS1307.7 R3.2 | length 2.4
  Bottom Layer w0.127: R3.2 57.303,32.258 DS1307.7
"NetFUSE 500mA_2": "FUSE 500mA.2" "VIN - 5vdc.1" | length 21.8
  Top Layer w0.254: 46.25,15.84 52.232,15.84 54.102,13.97 54.102,7.62 56.222,5.5 60,5.5
NetHC-06_3: HC-06.3 U1.1 | length 42.9
  Top Layer w0.127: U1.1 50.067,40.767 v1(53.721,40.767)
  Bottom Layer w0.127: v1(53.721,40.767) 81.026,40.767 83.82,37.973 83.82,34.09 HC-06.3
NetHC-06_4: HC-06.4 U1.44 | length 33.8
  Top Layer w0.127: U1.44 51.706,38.994 53.716,38.994 v1(53.721,38.989)
  Bottom Layer w0.127: v1(53.721,38.989) 79.756,38.989 81.026,37.719 81.026,33.836 HC-06.4
NetICSP_2: ICSP.2 R7.2 | length 3.1
  Bottom Layer w0.127: R7.2 17.96,21.46 ICSP.2
NetICSP_4: ICSP.4 U1.17 | length 30.3
  Top Layer w0.127: ICSP.4 21.023,26.563 21.991,26.563 23.241,27.813 23.241,36.449 24.765,37.973 v1(29.21,37.973) ; v1(33.528,37.973) 36.501,35 U1.17
  Bottom Layer w0.127: v1(29.21,37.973) v1(33.528,37.973)
NetICSP_5: ICSP.5 U1.16 | length 29.3
  Top Layer w0.127: ICSP.5 21,36.494 23.749,39.243 v1(29.21,39.243) ; v1(33.401,39.243) 36.844,35.8 U1.16
  Bottom Layer w0.127: v1(29.21,39.243) v1(33.401,39.243)
NetQ1_2: Q1.2 R8.2 | length 45.6
  Bottom Layer w0.127: Q1.2 34.29,45.861 34.29,27.432 38.354,23.368 52.832,23.368 54.483,25.019 R8.2
NetR8_1: R8.1 U1.36 | length 2.8
  Top Layer w0.127: U1.36 51.731,32.569 54.452,32.569 v1(54.483,32.538)
RESET: C10.2 CN-PCB-FRONT.20 D3.1 ICSP.1 U1.18 | length 54.2
  Top Layer w0.127: ICSP.1 36.28,34.2 ; CN-PCB-FRONT.20 29.21,48.37 29.21,41.27 36.28,34.2 ; U1.18 36.28,34.2
  Bottom Layer w0.127: ICSP.1 21,16.363 D3.1 21.011,16.262 C10.2
S0: CN-PCB-FRONT.2 U1.8 | length 22
  Top Layer w0.127: v1(44.112,43.18) 44.112,43.063 44.4,42.775 U1.8
  Bottom Layer w0.127: v1(44.112,43.18) 52.197,43.18 56.462,47.445 56.462,49.731 56.43,49.764 CN-PCB-FRONT.2
S1: CN-PCB-FRONT.4 U1.9 | length 17.8
  Top Layer w0.127: U1.9 43.6,42.818 43.494,42.924 43.494,44.51 43.815,44.831 45.593,44.831 45.992,45.23 45.992,45.484 v1(46.482,45.974)
  Bottom Layer w0.127: v1(46.482,45.974) 46.61,45.974 46.881,46.246 47.135,46.246 53.619,52.73 CN-PCB-FRONT.4
S2: CN-PCB-FRONT.6 U1.10 | length 19.5
  Top Layer w0.127: U1.10 42.8,41.425 42.188,42.037 41.148,42.037 40.64,42.545 40.64,43.307 43.053,45.72 45.355,45.72 46.226,46.591 46.337,46.591 46.608,46.863 v1(46.736,46.863)
  Bottom Layer w0.127: v1(46.736,46.863) 51.35,51.477 CN-PCB-FRONT.6
S3: CN-PCB-FRONT.8 U1.11 | length 18.8
  Top Layer w0.127: U1.11 40.707,40.7 39.751,41.656 39.751,43.561 42.291,46.101 44.45,46.101 45.339,46.99 v1(45.466,46.99)
  Bottom Layer w0.127: v1(45.466,46.99) 48.81,50.334 CN-PCB-FRONT.8
S4: CN-PCB-FRONT.10 U1.14 | length 20.8
  Top Layer w0.127: U1.14 39.575,37.4 38.735,38.24 38.735,43.688 41.91,46.863 44.069,46.863 v1(45.339,48.133)
  Bottom Layer w0.127: v1(45.339,48.133) 46.27,49.064 CN-PCB-FRONT.10
VO: "BRILLO LCD.2" CN-PCB-FRONT.14 | length 24.4
  Bottom Layer w0.127: 22.86,56.515 23.622,57.277 41.656,57.277 42.291,56.642 42.291,54.674 41.338,53.721 41.338,52.878 CN-PCB-FRONT.14
pads on no net: "VIN - 5vdc.2" "VIN - 5vdc.3" DHT11.3 U1.12 U1.13 U1.20 U1.21 U1.22 U1.23 U1.24 U1.26 U1.32 U1.33 U1.34 U1.35 U1.43

## Polygon pours and split planes (outlines as drawn)
GND on Top Layer "GND_TOP" (solid, remove dead copper, pour order 0): 0,5 0,55 cw(c5,55) 5,60 85,60 cw(c85,55) 90,55 90,5 cw(c85,5) 85,0 5,0 cw(c5,5)
GND on Bottom Layer "GND_BOTTOM" (solid, remove dead copper, pour order 1): 0,5 0,55 cw(c5,55) 5,60 85,60 cw(c85,55) 90,55 90,5 cw(c85,5) 85,0 5,0 cw(c5,5)

## Silkscreen, mask and mechanical layers (free items; w line width, h text height)
Top Overlay:
  lines w0.127: 15.5,2.5 28.5,2.5 28.5,45.5 15.5,45.5 15.5,2.5 ; 79.1,20 89.1,20 89.1,40 79.1,40 79.1,20
  text "RX" at 83.058,33.274 h1
  text "TX" at 83.058,30.734 h1
  text "PGC" at 22.987,28.702 h1
  text "GND" at 83.058,28.194 h1
  text "PGD" at 22.987,25.908 h1
  text "VCC" at 83.058,25.654 h1
  text "GND" at 22.987,23.368 h1
  text "VCC" at 22.987,20.828 h1
  text "VPP" at 22.987,18.288 h1
Mechanical 1:
  circle w0.254: c80,10 r2.426
  circle w0.254: c80,50 r2
  circle w0.254: c10,10 r2
  circle w0.254: c9.906,50.038 r2
  lines w1: 0,5 ccw(c5,5) 5,0 85.001,0 ccw(c85.001,5) 90.001,5 90.001,55.001 ccw(c85.001,55.001) 85.001,60.001 5,60.001 ccw(c5,55.001) 0,55.001 0,5

## Text inside footprints (layer, text, board x,y; h text height)
1Hz: Top Overlay "+" at 66.294,41.021 h0.8 r90
ICSP: Top Overlay "5" at 19.3,28.7 h1.02 r90; Top Overlay "1" at 19.3,18.8 h1.02 r90